# EAGLE board SparkFun_ESLOV_to_Qwiic_Bridge-Panel (EAGLE 9.6.2), part 1 of 3
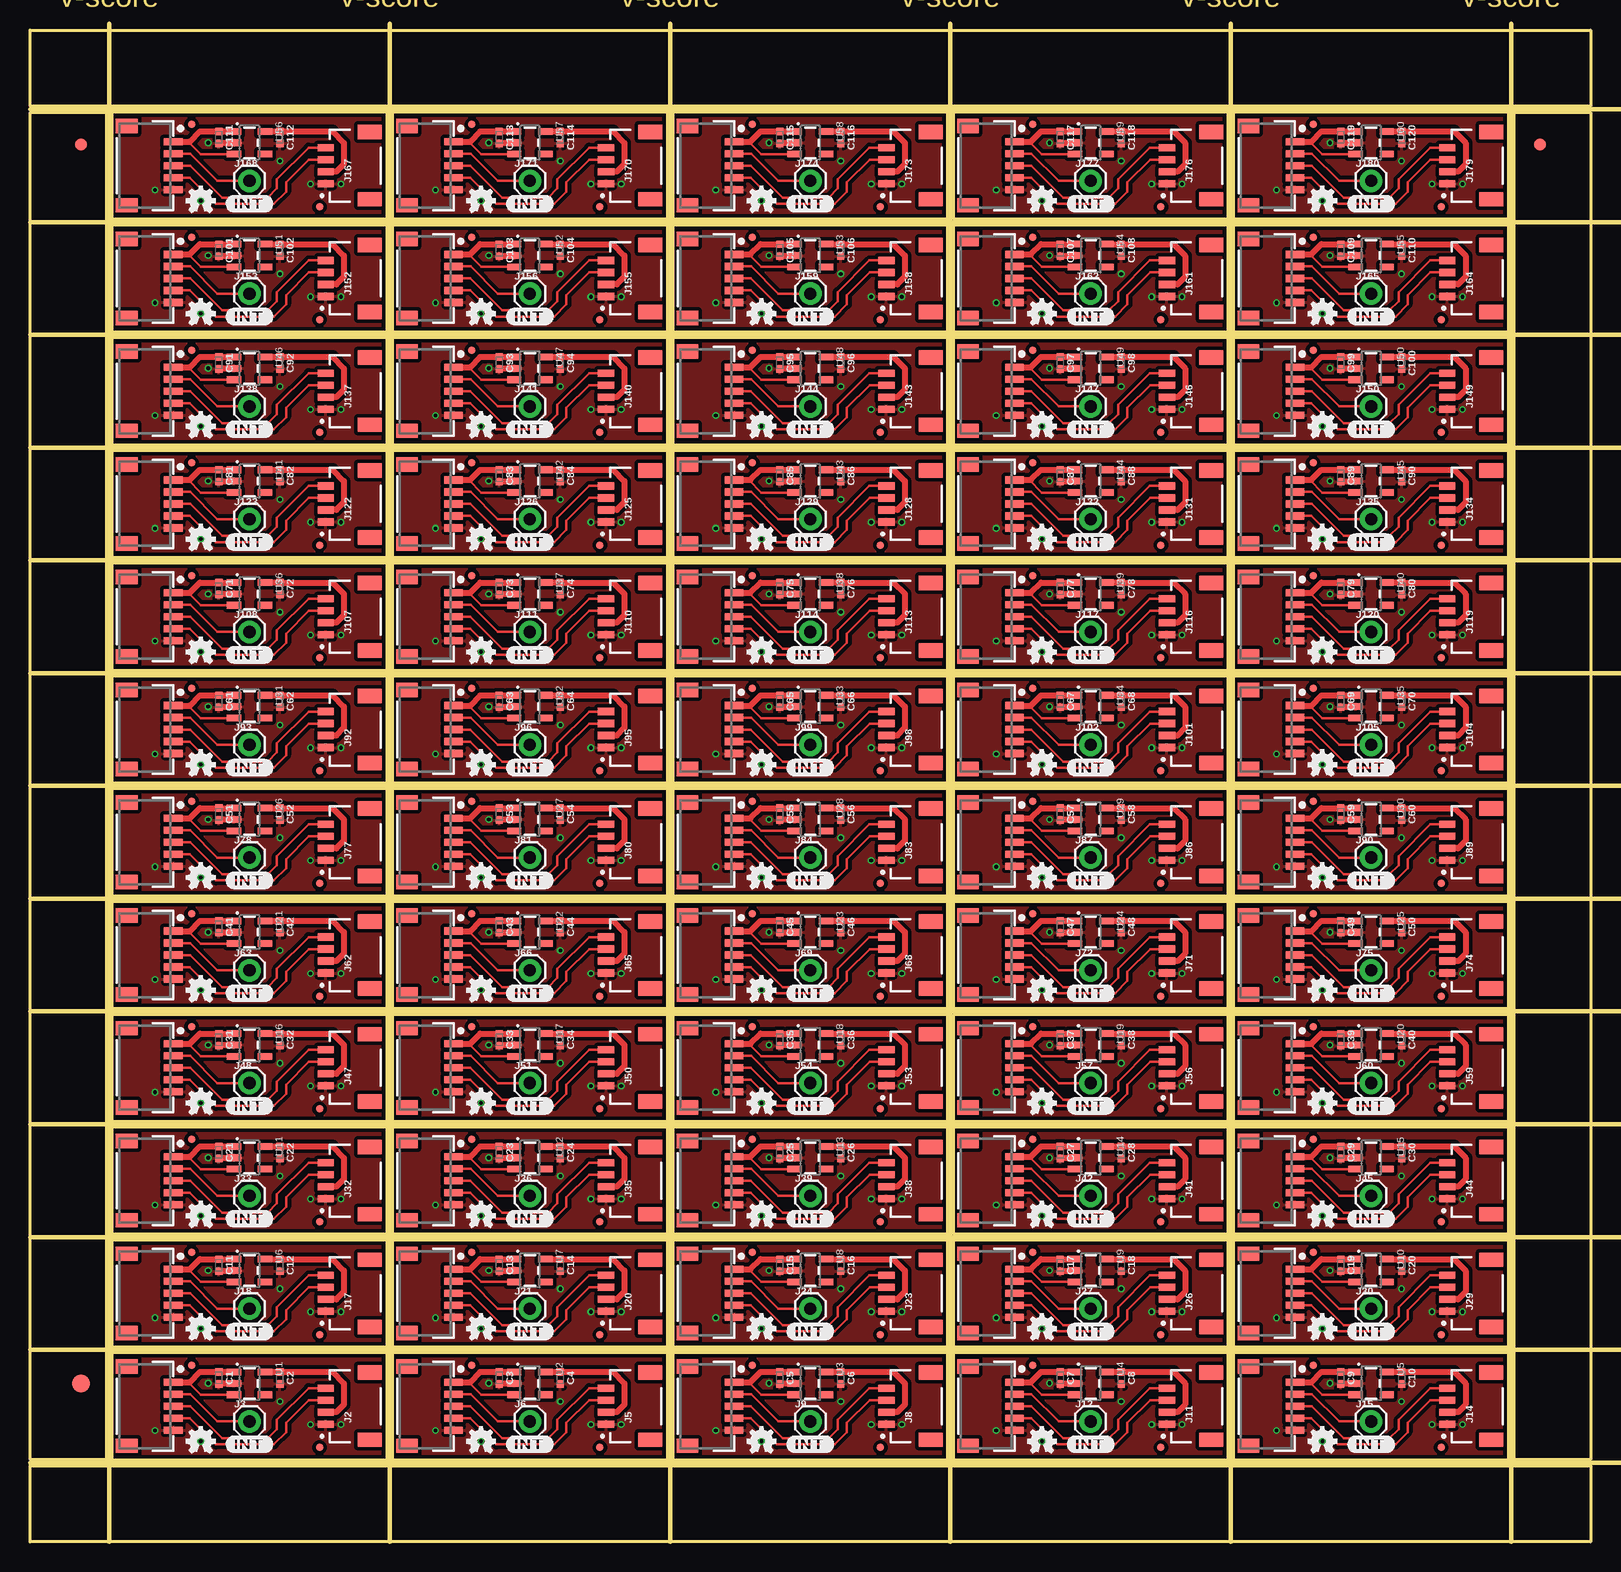
[diagram p0: board, top side]
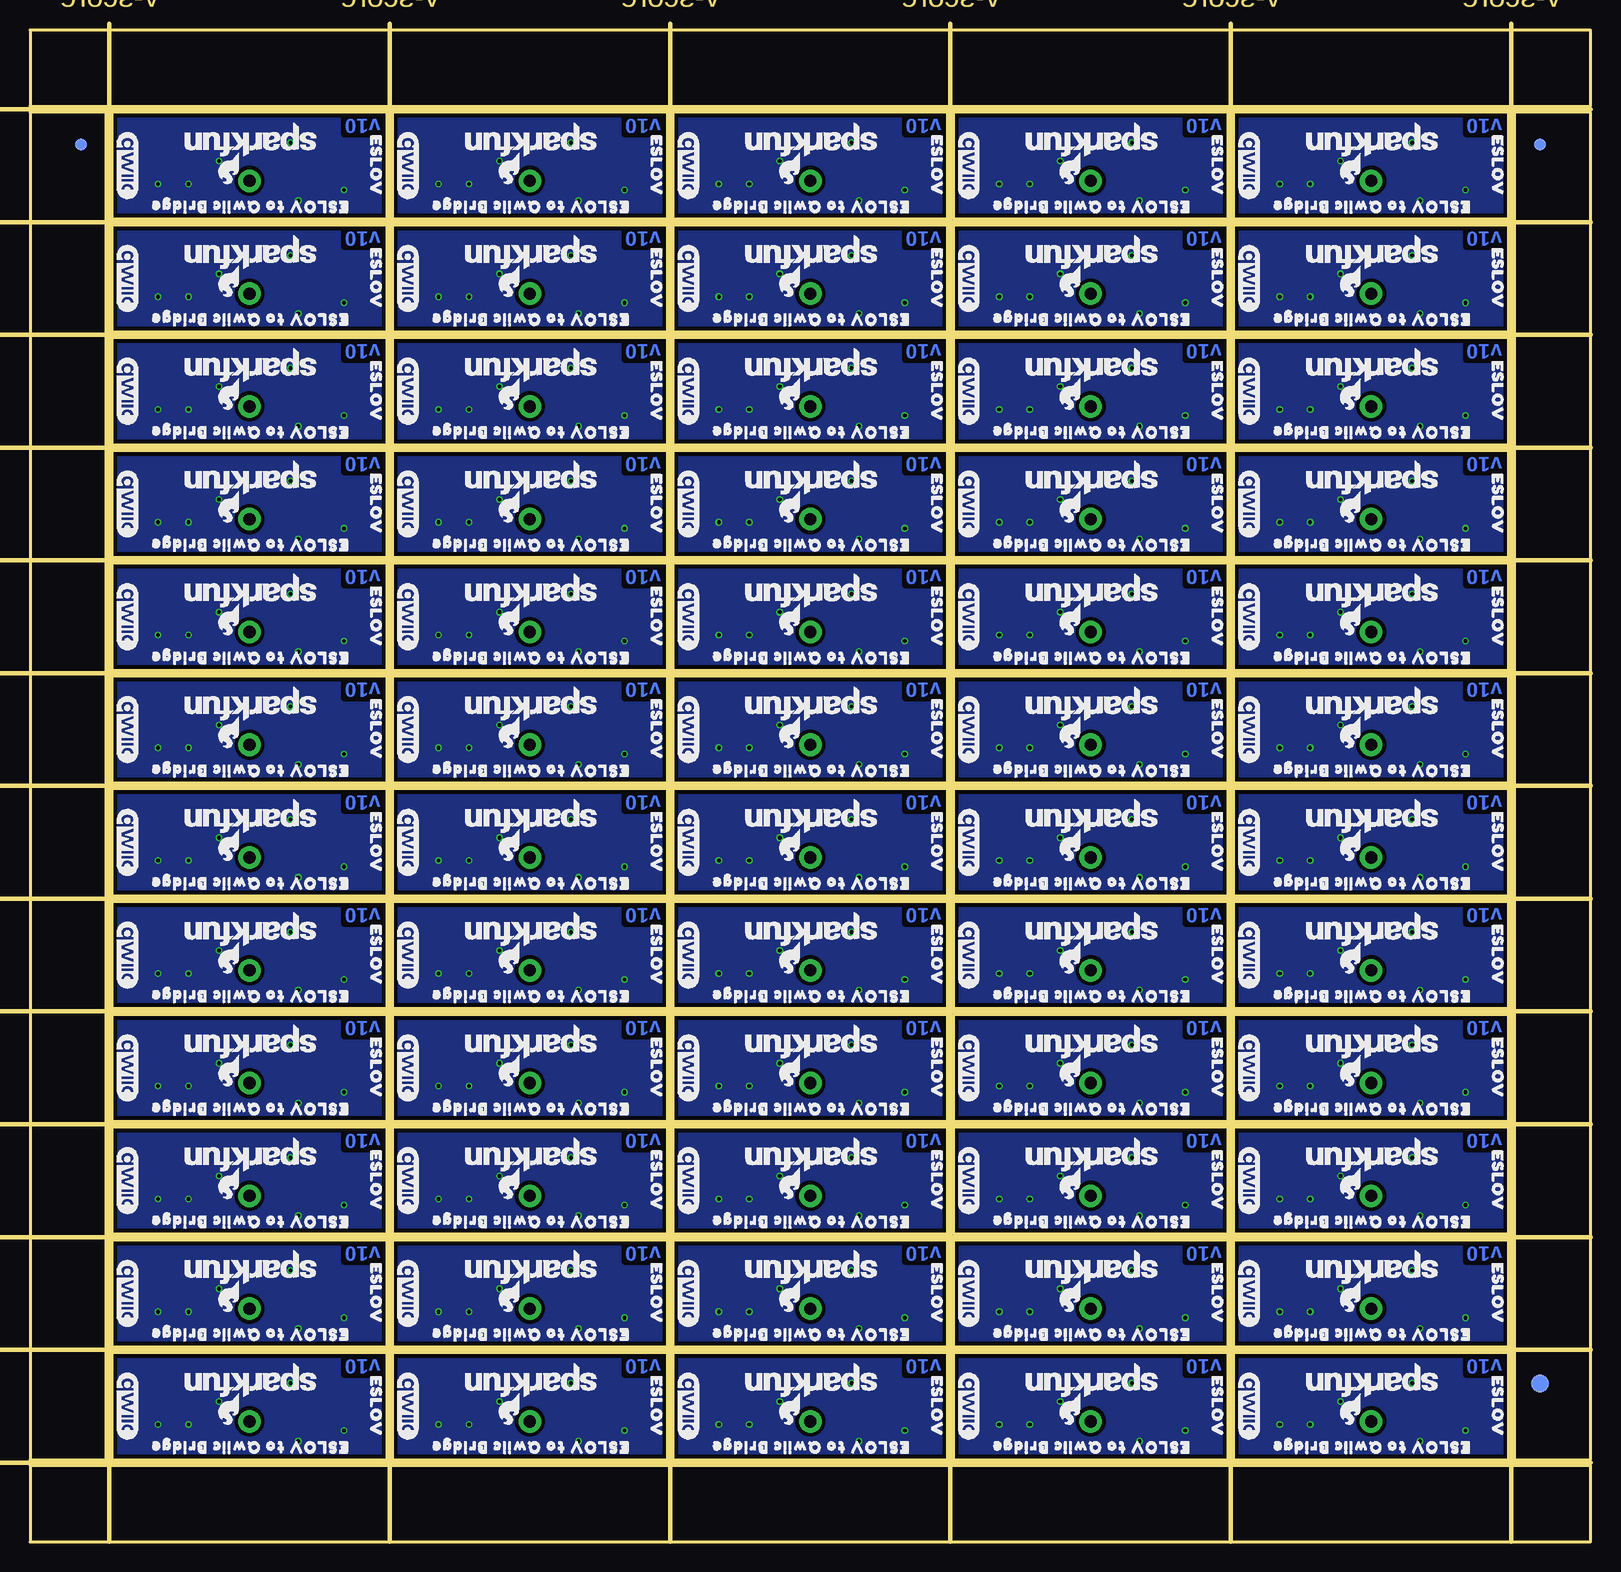
[diagram p1: board, bottom side, seen from below]

Size 130.05 x 125.98 mm. Coordinates in mm from the lower left corner, seen from the top.
Outline: 256 segments
Copper layers (1*16): Top 0.035mm / dielectric 1.5mm / Bottom 0.035mm
Design rules "SparkFun_ESLOV_to_Qwiic_Bridge": minimum track width 5mil, minimum drill 0.3mm, track to track 5mil, track to pad 5mil, pad to pad 5mil, via to via 5mil, smd to smd 5mil, copper to edge 7mil, drill to drill 7mil, minimum pad ring 5mil, minimum via ring 5mil, stop-mask expansion 2.5mil, vias tented up to drill 25mil, thermal gap 10mil
Milling: 19 lines

## Footprints (pad centres in the part's own frame; a part is rotated, then mirrored left to right if it is on the bottom)
0402-TIGHT = smd 0.6 x 0.6: 1 -0.5,0; 2 0.5,0
FIDUCIAL-1X2 = smd 1 x 1: 1 0,0
FIDUCIAL-1.5X3 = smd 1.5 x 1.5: 1 0,0
FIDUCIAL-MICRO = smd 0.635 x 0.635: 1 0,0
JST_5_1MM_RA = smd 0.6 x 1.55: 1 -2,0; 2 -1,0; 3 0,0; 4 1,0; 5 2,0 | smd 1.2 x 1.8: NC1 3.3,-3.875; NC2 -3.3,-3.875
JST04_1MM_RA = smd 0.6 x 1.35: 1 -1.5,0; 2 -0.5,0; 3 0.5,0; 4 1.5,0 | smd 1.2 x 2: NC1 2.8,-3.675; NC2 -2.8,-3.675
1X01 = drill 1.016 pad 1.88: 1 0,0
SOT23-5 = smd 0.55 x 1.2: 1 -0.95,-1.3; 2 0,-1.3; 3 0.95,-1.3; 4 0.95,1.3; 5 -0.95,1.3

## Placement (x,y rotation side)
C1  1.0uF  [0402-TIGHT]  15.75,13.65 270 top
C2  1.0uF  [0402-TIGHT]  20.83,13.65 270 top
C3  1.0uF  [0402-TIGHT]  39.12,13.65 270 top
C4  1.0uF  [0402-TIGHT]  44.2,13.65 270 top
C5  1.0uF  [0402-TIGHT]  62.48,13.65 270 top
C6  1.0uF  [0402-TIGHT]  67.56,13.65 270 top
C7  1.0uF  [0402-TIGHT]  85.85,13.65 270 top
C8  1.0uF  [0402-TIGHT]  90.93,13.65 270 top
C9  1.0uF  [0402-TIGHT]  109.22,13.65 270 top
C10  1.0uF  [0402-TIGHT]  114.3,13.65 270 top
C11  1.0uF  [0402-TIGHT]  15.75,23.05 270 top
C12  1.0uF  [0402-TIGHT]  20.83,23.05 270 top
C13  1.0uF  [0402-TIGHT]  39.12,23.05 270 top
C14  1.0uF  [0402-TIGHT]  44.2,23.05 270 top
C15  1.0uF  [0402-TIGHT]  62.48,23.05 270 top
C16  1.0uF  [0402-TIGHT]  67.56,23.05 270 top
C17  1.0uF  [0402-TIGHT]  85.85,23.05 270 top
C18  1.0uF  [0402-TIGHT]  90.93,23.05 270 top
C19  1.0uF  [0402-TIGHT]  109.22,23.05 270 top
C20  1.0uF  [0402-TIGHT]  114.3,23.05 270 top
C21  1.0uF  [0402-TIGHT]  15.75,32.45 270 top
C22  1.0uF  [0402-TIGHT]  20.83,32.45 270 top
C23  1.0uF  [0402-TIGHT]  39.12,32.45 270 top
C24  1.0uF  [0402-TIGHT]  44.2,32.45 270 top
C25  1.0uF  [0402-TIGHT]  62.48,32.45 270 top
C26  1.0uF  [0402-TIGHT]  67.56,32.45 270 top
C27  1.0uF  [0402-TIGHT]  85.85,32.45 270 top
C28  1.0uF  [0402-TIGHT]  90.93,32.45 270 top
C29  1.0uF  [0402-TIGHT]  109.22,32.45 270 top
C30  1.0uF  [0402-TIGHT]  114.3,32.45 270 top
C31  1.0uF  [0402-TIGHT]  15.75,41.85 270 top
C32  1.0uF  [0402-TIGHT]  20.83,41.85 270 top
C33  1.0uF  [0402-TIGHT]  39.12,41.85 270 top
C34  1.0uF  [0402-TIGHT]  44.2,41.85 270 top
C35  1.0uF  [0402-TIGHT]  62.48,41.85 270 top
C36  1.0uF  [0402-TIGHT]  67.56,41.85 270 top
C37  1.0uF  [0402-TIGHT]  85.85,41.85 270 top
C38  1.0uF  [0402-TIGHT]  90.93,41.85 270 top
C39  1.0uF  [0402-TIGHT]  109.22,41.85 270 top
C40  1.0uF  [0402-TIGHT]  114.3,41.85 270 top
C41  1.0uF  [0402-TIGHT]  15.75,51.24 270 top
C42  1.0uF  [0402-TIGHT]  20.83,51.24 270 top
C43  1.0uF  [0402-TIGHT]  39.12,51.24 270 top
C44  1.0uF  [0402-TIGHT]  44.2,51.24 270 top
C45  1.0uF  [0402-TIGHT]  62.48,51.24 270 top
C46  1.0uF  [0402-TIGHT]  67.56,51.24 270 top
C47  1.0uF  [0402-TIGHT]  85.85,51.24 270 top
C48  1.0uF  [0402-TIGHT]  90.93,51.24 270 top
C49  1.0uF  [0402-TIGHT]  109.22,51.24 270 top
C50  1.0uF  [0402-TIGHT]  114.3,51.24 270 top
C51  1.0uF  [0402-TIGHT]  15.75,60.64 270 top
C52  1.0uF  [0402-TIGHT]  20.83,60.64 270 top
C53  1.0uF  [0402-TIGHT]  39.12,60.64 270 top
C54  1.0uF  [0402-TIGHT]  44.2,60.64 270 top
C55  1.0uF  [0402-TIGHT]  62.48,60.64 270 top
C56  1.0uF  [0402-TIGHT]  67.56,60.64 270 top
C57  1.0uF  [0402-TIGHT]  85.85,60.64 270 top
C58  1.0uF  [0402-TIGHT]  90.93,60.64 270 top
C59  1.0uF  [0402-TIGHT]  109.22,60.64 270 top
C60  1.0uF  [0402-TIGHT]  114.3,60.64 270 top
C61  1.0uF  [0402-TIGHT]  15.75,70.04 270 top
C62  1.0uF  [0402-TIGHT]  20.83,70.04 270 top
C63  1.0uF  [0402-TIGHT]  39.12,70.04 270 top
C64  1.0uF  [0402-TIGHT]  44.2,70.04 270 top
C65  1.0uF  [0402-TIGHT]  62.48,70.04 270 top
C66  1.0uF  [0402-TIGHT]  67.56,70.04 270 top
C67  1.0uF  [0402-TIGHT]  85.85,70.04 270 top
C68  1.0uF  [0402-TIGHT]  90.93,70.04 270 top
C69  1.0uF  [0402-TIGHT]  109.22,70.04 270 top
C70  1.0uF  [0402-TIGHT]  114.3,70.04 270 top
C71  1.0uF  [0402-TIGHT]  15.75,79.44 270 top
C72  1.0uF  [0402-TIGHT]  20.83,79.44 270 top
C73  1.0uF  [0402-TIGHT]  39.12,79.44 270 top
C74  1.0uF  [0402-TIGHT]  44.2,79.44 270 top
C75  1.0uF  [0402-TIGHT]  62.48,79.44 270 top
C76  1.0uF  [0402-TIGHT]  67.56,79.44 270 top
C77  1.0uF  [0402-TIGHT]  85.85,79.44 270 top
C78  1.0uF  [0402-TIGHT]  90.93,79.44 270 top
C79  1.0uF  [0402-TIGHT]  109.22,79.44 270 top
C80  1.0uF  [0402-TIGHT]  114.3,79.44 270 top
C81  1.0uF  [0402-TIGHT]  15.75,88.84 270 top
C82  1.0uF  [0402-TIGHT]  20.83,88.84 270 top
C83  1.0uF  [0402-TIGHT]  39.12,88.84 270 top
C84  1.0uF  [0402-TIGHT]  44.2,88.84 270 top
C85  1.0uF  [0402-TIGHT]  62.48,88.84 270 top
C86  1.0uF  [0402-TIGHT]  67.56,88.84 270 top
C87  1.0uF  [0402-TIGHT]  85.85,88.84 270 top
C88  1.0uF  [0402-TIGHT]  90.93,88.84 270 top
C89  1.0uF  [0402-TIGHT]  109.22,88.84 270 top
C90  1.0uF  [0402-TIGHT]  114.3,88.84 270 top
C91  1.0uF  [0402-TIGHT]  15.75,98.23 270 top
C92  1.0uF  [0402-TIGHT]  20.83,98.23 270 top
C93  1.0uF  [0402-TIGHT]  39.12,98.23 270 top
C94  1.0uF  [0402-TIGHT]  44.2,98.23 270 top
C95  1.0uF  [0402-TIGHT]  62.48,98.23 270 top
C96  1.0uF  [0402-TIGHT]  67.56,98.23 270 top
C97  1.0uF  [0402-TIGHT]  85.85,98.23 270 top
C98  1.0uF  [0402-TIGHT]  90.93,98.23 270 top
C99  1.0uF  [0402-TIGHT]  109.22,98.23 270 top
C100  1.0uF  [0402-TIGHT]  114.3,98.23 270 top
C101  1.0uF  [0402-TIGHT]  15.75,107.63 270 top
C102  1.0uF  [0402-TIGHT]  20.83,107.63 270 top
C103  1.0uF  [0402-TIGHT]  39.12,107.63 270 top
C104  1.0uF  [0402-TIGHT]  44.2,107.63 270 top
C105  1.0uF  [0402-TIGHT]  62.48,107.63 270 top
C106  1.0uF  [0402-TIGHT]  67.56,107.63 270 top
C107  1.0uF  [0402-TIGHT]  85.85,107.63 270 top
C108  1.0uF  [0402-TIGHT]  90.93,107.63 270 top
C109  1.0uF  [0402-TIGHT]  109.22,107.63 270 top
C110  1.0uF  [0402-TIGHT]  114.3,107.63 270 top
C111  1.0uF  [0402-TIGHT]  15.75,117.03 270 top
C112  1.0uF  [0402-TIGHT]  20.83,117.03 270 top
C113  1.0uF  [0402-TIGHT]  39.12,117.03 270 top
C114  1.0uF  [0402-TIGHT]  44.2,117.03 270 top
C115  1.0uF  [0402-TIGHT]  62.48,117.03 270 top
C116  1.0uF  [0402-TIGHT]  67.56,117.03 270 top
C117  1.0uF  [0402-TIGHT]  85.85,117.03 270 top
C118  1.0uF  [0402-TIGHT]  90.93,117.03 270 top
C119  1.0uF  [0402-TIGHT]  109.22,117.03 270 top
C120  1.0uF  [0402-TIGHT]  114.3,117.03 270 top
E$1  [FIDUCIAL-1X2]  4.23,116.46 0 top
E$2  [FIDUCIAL-1X2]  4.23,116.46 0 bottom
E$3  [FIDUCIAL-1X2]  125.81,116.46 0 top
E$4  [FIDUCIAL-1X2]  125.81,116.46 0 bottom
E$5  [FIDUCIAL-1.5X3]  4.23,13.21 0 top
E$6  [FIDUCIAL-1.5X3]  4.23,13.21 0 bottom
FD1  FIDUCIALUFIDUCIAL  [FIDUCIAL-MICRO]  24.13,7.87 0 top
FD2  FIDUCIALUFIDUCIAL  [FIDUCIAL-MICRO]  13.46,14.73 0 top
FD3  FIDUCIALUFIDUCIAL  [FIDUCIAL-MICRO]  47.5,7.87 0 top
FD4  FIDUCIALUFIDUCIAL  [FIDUCIAL-MICRO]  36.83,14.73 0 top
FD5  FIDUCIALUFIDUCIAL  [FIDUCIAL-MICRO]  70.87,7.87 0 top
FD6  FIDUCIALUFIDUCIAL  [FIDUCIAL-MICRO]  60.2,14.73 0 top
FD7  FIDUCIALUFIDUCIAL  [FIDUCIAL-MICRO]  94.23,7.87 0 top
FD8  FIDUCIALUFIDUCIAL  [FIDUCIAL-MICRO]  83.57,14.73 0 top
FD9  FIDUCIALUFIDUCIAL  [FIDUCIAL-MICRO]  117.6,7.87 0 top
FD10  FIDUCIALUFIDUCIAL  [FIDUCIAL-MICRO]  106.93,14.73 0 top
FD11  FIDUCIALUFIDUCIAL  [FIDUCIAL-MICRO]  24.13,17.27 0 top
FD12  FIDUCIALUFIDUCIAL  [FIDUCIAL-MICRO]  13.46,24.13 0 top
FD13  FIDUCIALUFIDUCIAL  [FIDUCIAL-MICRO]  47.5,17.27 0 top
FD14  FIDUCIALUFIDUCIAL  [FIDUCIAL-MICRO]  36.83,24.13 0 top
FD15  FIDUCIALUFIDUCIAL  [FIDUCIAL-MICRO]  70.87,17.27 0 top
FD16  FIDUCIALUFIDUCIAL  [FIDUCIAL-MICRO]  60.2,24.13 0 top
FD17  FIDUCIALUFIDUCIAL  [FIDUCIAL-MICRO]  94.23,17.27 0 top
FD18  FIDUCIALUFIDUCIAL  [FIDUCIAL-MICRO]  83.57,24.13 0 top
FD19  FIDUCIALUFIDUCIAL  [FIDUCIAL-MICRO]  117.6,17.27 0 top
FD20  FIDUCIALUFIDUCIAL  [FIDUCIAL-MICRO]  106.93,24.13 0 top
FD21  FIDUCIALUFIDUCIAL  [FIDUCIAL-MICRO]  24.13,26.67 0 top
FD22  FIDUCIALUFIDUCIAL  [FIDUCIAL-MICRO]  13.46,33.53 0 top
FD23  FIDUCIALUFIDUCIAL  [FIDUCIAL-MICRO]  47.5,26.67 0 top
FD24  FIDUCIALUFIDUCIAL  [FIDUCIAL-MICRO]  36.83,33.53 0 top
FD25  FIDUCIALUFIDUCIAL  [FIDUCIAL-MICRO]  70.87,26.67 0 top
FD26  FIDUCIALUFIDUCIAL  [FIDUCIAL-MICRO]  60.2,33.53 0 top
FD27  FIDUCIALUFIDUCIAL  [FIDUCIAL-MICRO]  94.23,26.67 0 top
FD28  FIDUCIALUFIDUCIAL  [FIDUCIAL-MICRO]  83.57,33.53 0 top
FD29  FIDUCIALUFIDUCIAL  [FIDUCIAL-MICRO]  117.6,26.67 0 top
FD30  FIDUCIALUFIDUCIAL  [FIDUCIAL-MICRO]  106.93,33.53 0 top
FD31  FIDUCIALUFIDUCIAL  [FIDUCIAL-MICRO]  24.13,36.07 0 top
FD32  FIDUCIALUFIDUCIAL  [FIDUCIAL-MICRO]  13.46,42.93 0 top
FD33  FIDUCIALUFIDUCIAL  [FIDUCIAL-MICRO]  47.5,36.07 0 top
FD34  FIDUCIALUFIDUCIAL  [FIDUCIAL-MICRO]  36.83,42.93 0 top
FD35  FIDUCIALUFIDUCIAL  [FIDUCIAL-MICRO]  70.87,36.07 0 top
FD36  FIDUCIALUFIDUCIAL  [FIDUCIAL-MICRO]  60.2,42.93 0 top
FD37  FIDUCIALUFIDUCIAL  [FIDUCIAL-MICRO]  94.23,36.07 0 top
FD38  FIDUCIALUFIDUCIAL  [FIDUCIAL-MICRO]  83.57,42.93 0 top
FD39  FIDUCIALUFIDUCIAL  [FIDUCIAL-MICRO]  117.6,36.07 0 top
FD40  FIDUCIALUFIDUCIAL  [FIDUCIAL-MICRO]  106.93,42.93 0 top
FD41  FIDUCIALUFIDUCIAL  [FIDUCIAL-MICRO]  24.13,45.47 0 top
FD42  FIDUCIALUFIDUCIAL  [FIDUCIAL-MICRO]  13.46,52.32 0 top
FD43  FIDUCIALUFIDUCIAL  [FIDUCIAL-MICRO]  47.5,45.47 0 top
FD44  FIDUCIALUFIDUCIAL  [FIDUCIAL-MICRO]  36.83,52.32 0 top
FD45  FIDUCIALUFIDUCIAL  [FIDUCIAL-MICRO]  70.87,45.47 0 top
FD46  FIDUCIALUFIDUCIAL  [FIDUCIAL-MICRO]  60.2,52.32 0 top
FD47  FIDUCIALUFIDUCIAL  [FIDUCIAL-MICRO]  94.23,45.47 0 top
FD48  FIDUCIALUFIDUCIAL  [FIDUCIAL-MICRO]  83.57,52.32 0 top
FD49  FIDUCIALUFIDUCIAL  [FIDUCIAL-MICRO]  117.6,45.47 0 top
FD50  FIDUCIALUFIDUCIAL  [FIDUCIAL-MICRO]  106.93,52.32 0 top
FD51  FIDUCIALUFIDUCIAL  [FIDUCIAL-MICRO]  24.13,54.86 0 top
FD52  FIDUCIALUFIDUCIAL  [FIDUCIAL-MICRO]  13.46,61.72 0 top
FD53  FIDUCIALUFIDUCIAL  [FIDUCIAL-MICRO]  47.5,54.86 0 top
FD54  FIDUCIALUFIDUCIAL  [FIDUCIAL-MICRO]  36.83,61.72 0 top
FD55  FIDUCIALUFIDUCIAL  [FIDUCIAL-MICRO]  70.87,54.86 0 top
FD56  FIDUCIALUFIDUCIAL  [FIDUCIAL-MICRO]  60.2,61.72 0 top
FD57  FIDUCIALUFIDUCIAL  [FIDUCIAL-MICRO]  94.23,54.86 0 top
FD58  FIDUCIALUFIDUCIAL  [FIDUCIAL-MICRO]  83.57,61.72 0 top
FD59  FIDUCIALUFIDUCIAL  [FIDUCIAL-MICRO]  117.6,54.86 0 top
FD60  FIDUCIALUFIDUCIAL  [FIDUCIAL-MICRO]  106.93,61.72 0 top
FD61  FIDUCIALUFIDUCIAL  [FIDUCIAL-MICRO]  24.13,64.26 0 top
FD62  FIDUCIALUFIDUCIAL  [FIDUCIAL-MICRO]  13.46,71.12 0 top
FD63  FIDUCIALUFIDUCIAL  [FIDUCIAL-MICRO]  47.5,64.26 0 top
FD64  FIDUCIALUFIDUCIAL  [FIDUCIAL-MICRO]  36.83,71.12 0 top
FD65  FIDUCIALUFIDUCIAL  [FIDUCIAL-MICRO]  70.87,64.26 0 top
FD66  FIDUCIALUFIDUCIAL  [FIDUCIAL-MICRO]  60.2,71.12 0 top
FD67  FIDUCIALUFIDUCIAL  [FIDUCIAL-MICRO]  94.23,64.26 0 top
FD68  FIDUCIALUFIDUCIAL  [FIDUCIAL-MICRO]  83.57,71.12 0 top
FD69  FIDUCIALUFIDUCIAL  [FIDUCIAL-MICRO]  117.6,64.26 0 top
FD70  FIDUCIALUFIDUCIAL  [FIDUCIAL-MICRO]  106.93,71.12 0 top
FD71  FIDUCIALUFIDUCIAL  [FIDUCIAL-MICRO]  24.13,73.66 0 top
FD72  FIDUCIALUFIDUCIAL  [FIDUCIAL-MICRO]  13.46,80.52 0 top
FD73  FIDUCIALUFIDUCIAL  [FIDUCIAL-MICRO]  47.5,73.66 0 top
FD74  FIDUCIALUFIDUCIAL  [FIDUCIAL-MICRO]  36.83,80.52 0 top
FD75  FIDUCIALUFIDUCIAL  [FIDUCIAL-MICRO]  70.87,73.66 0 top
FD76  FIDUCIALUFIDUCIAL  [FIDUCIAL-MICRO]  60.2,80.52 0 top
FD77  FIDUCIALUFIDUCIAL  [FIDUCIAL-MICRO]  94.23,73.66 0 top
FD78  FIDUCIALUFIDUCIAL  [FIDUCIAL-MICRO]  83.57,80.52 0 top
FD79  FIDUCIALUFIDUCIAL  [FIDUCIAL-MICRO]  117.6,73.66 0 top
FD80  FIDUCIALUFIDUCIAL  [FIDUCIAL-MICRO]  106.93,80.52 0 top
FD81  FIDUCIALUFIDUCIAL  [FIDUCIAL-MICRO]  24.13,83.06 0 top
FD82  FIDUCIALUFIDUCIAL  [FIDUCIAL-MICRO]  13.46,89.92 0 top
FD83  FIDUCIALUFIDUCIAL  [FIDUCIAL-MICRO]  47.5,83.06 0 top
FD84  FIDUCIALUFIDUCIAL  [FIDUCIAL-MICRO]  36.83,89.92 0 top
FD85  FIDUCIALUFIDUCIAL  [FIDUCIAL-MICRO]  70.87,83.06 0 top
FD86  FIDUCIALUFIDUCIAL  [FIDUCIAL-MICRO]  60.2,89.92 0 top
FD87  FIDUCIALUFIDUCIAL  [FIDUCIAL-MICRO]  94.23,83.06 0 top
FD88  FIDUCIALUFIDUCIAL  [FIDUCIAL-MICRO]  83.57,89.92 0 top
FD89  FIDUCIALUFIDUCIAL  [FIDUCIAL-MICRO]  117.6,83.06 0 top
FD90  FIDUCIALUFIDUCIAL  [FIDUCIAL-MICRO]  106.93,89.92 0 top
FD91  FIDUCIALUFIDUCIAL  [FIDUCIAL-MICRO]  24.13,92.46 0 top
FD92  FIDUCIALUFIDUCIAL  [FIDUCIAL-MICRO]  13.46,99.31 0 top
FD93  FIDUCIALUFIDUCIAL  [FIDUCIAL-MICRO]  47.5,92.46 0 top
FD94  FIDUCIALUFIDUCIAL  [FIDUCIAL-MICRO]  36.83,99.31 0 top
FD95  FIDUCIALUFIDUCIAL  [FIDUCIAL-MICRO]  70.87,92.46 0 top
FD96  FIDUCIALUFIDUCIAL  [FIDUCIAL-MICRO]  60.2,99.31 0 top
FD97  FIDUCIALUFIDUCIAL  [FIDUCIAL-MICRO]  94.23,92.46 0 top
FD98  FIDUCIALUFIDUCIAL  [FIDUCIAL-MICRO]  83.57,99.31 0 top
FD99  FIDUCIALUFIDUCIAL  [FIDUCIAL-MICRO]  117.6,92.46 0 top
FD100  FIDUCIALUFIDUCIAL  [FIDUCIAL-MICRO]  106.93,99.31 0 top
FD101  FIDUCIALUFIDUCIAL  [FIDUCIAL-MICRO]  24.13,101.85 0 top
FD102  FIDUCIALUFIDUCIAL  [FIDUCIAL-MICRO]  13.46,108.71 0 top
FD103  FIDUCIALUFIDUCIAL  [FIDUCIAL-MICRO]  47.5,101.85 0 top
FD104  FIDUCIALUFIDUCIAL  [FIDUCIAL-MICRO]  36.83,108.71 0 top
FD105  FIDUCIALUFIDUCIAL  [FIDUCIAL-MICRO]  70.87,101.85 0 top
FD106  FIDUCIALUFIDUCIAL  [FIDUCIAL-MICRO]  60.2,108.71 0 top
FD107  FIDUCIALUFIDUCIAL  [FIDUCIAL-MICRO]  94.23,101.85 0 top
FD108  FIDUCIALUFIDUCIAL  [FIDUCIAL-MICRO]  83.57,108.71 0 top
FD109  FIDUCIALUFIDUCIAL  [FIDUCIAL-MICRO]  117.6,101.85 0 top
FD110  FIDUCIALUFIDUCIAL  [FIDUCIAL-MICRO]  106.93,108.71 0 top
FD111  FIDUCIALUFIDUCIAL  [FIDUCIAL-MICRO]  24.13,111.25 0 top
FD112  FIDUCIALUFIDUCIAL  [FIDUCIAL-MICRO]  13.46,118.11 0 top
FD113  FIDUCIALUFIDUCIAL  [FIDUCIAL-MICRO]  47.5,111.25 0 top
FD114  FIDUCIALUFIDUCIAL  [FIDUCIAL-MICRO]  36.83,118.11 0 top
FD115  FIDUCIALUFIDUCIAL  [FIDUCIAL-MICRO]  70.87,111.25 0 top
FD116  FIDUCIALUFIDUCIAL  [FIDUCIAL-MICRO]  60.2,118.11 0 top
FD117  FIDUCIALUFIDUCIAL  [FIDUCIAL-MICRO]  94.23,111.25 0 top
FD118  FIDUCIALUFIDUCIAL  [FIDUCIAL-MICRO]  83.57,118.11 0 top
FD119  FIDUCIALUFIDUCIAL  [FIDUCIAL-MICRO]  117.6,111.25 0 top
FD120  FIDUCIALUFIDUCIAL  [FIDUCIAL-MICRO]  106.93,118.11 0 top
J1  ESLOV RA  [JST_5_1MM_RA]  11.94,11.3 270 top
J2  QWIIC_RA  [JST04_1MM_RA]  24.64,11.3 90 top
J3  [1X01]  18.29,10.03 0 top
J4  ESLOV RA  [JST_5_1MM_RA]  35.31,11.3 270 top
J5  QWIIC_RA  [JST04_1MM_RA]  48.01,11.3 90 top
J6  [1X01]  41.66,10.03 0 top
J7  ESLOV RA  [JST_5_1MM_RA]  58.67,11.3 270 top
J8  QWIIC_RA  [JST04_1MM_RA]  71.37,11.3 90 top
J9  [1X01]  65.02,10.03 0 top
J10  ESLOV RA  [JST_5_1MM_RA]  82.04,11.3 270 top
J11  QWIIC_RA  [JST04_1MM_RA]  94.74,11.3 90 top
J12  [1X01]  88.39,10.03 0 top
J13  ESLOV RA  [JST_5_1MM_RA]  105.41,11.3 270 top
J14  QWIIC_RA  [JST04_1MM_RA]  118.11,11.3 90 top
J15  [1X01]  111.76,10.03 0 top
J16  ESLOV RA  [JST_5_1MM_RA]  11.94,20.7 270 top
J17  QWIIC_RA  [JST04_1MM_RA]  24.64,20.7 90 top
J18  [1X01]  18.29,19.43 0 top
J19  ESLOV RA  [JST_5_1MM_RA]  35.31,20.7 270 top
J20  QWIIC_RA  [JST04_1MM_RA]  48.01,20.7 90 top
J21  [1X01]  41.66,19.43 0 top
J22  ESLOV RA  [JST_5_1MM_RA]  58.67,20.7 270 top
J23  QWIIC_RA  [JST04_1MM_RA]  71.37,20.7 90 top
J24  [1X01]  65.02,19.43 0 top
J25  ESLOV RA  [JST_5_1MM_RA]  82.04,20.7 270 top
J26  QWIIC_RA  [JST04_1MM_RA]  94.74,20.7 90 top
J27  [1X01]  88.39,19.43 0 top
J28  ESLOV RA  [JST_5_1MM_RA]  105.41,20.7 270 top
J29  QWIIC_RA  [JST04_1MM_RA]  118.11,20.7 90 top
J30  [1X01]  111.76,19.43 0 top
J31  ESLOV RA  [JST_5_1MM_RA]  11.94,30.1 270 top
J32  QWIIC_RA  [JST04_1MM_RA]  24.64,30.1 90 top
J33  [1X01]  18.29,28.83 0 top
J34  ESLOV RA  [JST_5_1MM_RA]  35.31,30.1 270 top
J35  QWIIC_RA  [JST04_1MM_RA]  48.01,30.1 90 top
J36  [1X01]  41.66,28.83 0 top
J37  ESLOV RA  [JST_5_1MM_RA]  58.67,30.1 270 top
J38  QWIIC_RA  [JST04_1MM_RA]  71.37,30.1 90 top
J39  [1X01]  65.02,28.83 0 top
J40  ESLOV RA  [JST_5_1MM_RA]  82.04,30.1 270 top
J41  QWIIC_RA  [JST04_1MM_RA]  94.74,30.1 90 top
J42  [1X01]  88.39,28.83 0 top
J43  ESLOV RA  [JST_5_1MM_RA]  105.41,30.1 270 top
J44  QWIIC_RA  [JST04_1MM_RA]  118.11,30.1 90 top
J45  [1X01]  111.76,28.83 0 top
J46  ESLOV RA  [JST_5_1MM_RA]  11.94,39.5 270 top
J47  QWIIC_RA  [JST04_1MM_RA]  24.64,39.5 90 top
J48  [1X01]  18.29,38.23 0 top
J49  ESLOV RA  [JST_5_1MM_RA]  35.31,39.5 270 top
J50  QWIIC_RA  [JST04_1MM_RA]  48.01,39.5 90 top
J51  [1X01]  41.66,38.23 0 top
J52  ESLOV RA  [JST_5_1MM_RA]  58.67,39.5 270 top
J53  QWIIC_RA  [JST04_1MM_RA]  71.37,39.5 90 top
J54  [1X01]  65.02,38.23 0 top
J55  ESLOV RA  [JST_5_1MM_RA]  82.04,39.5 270 top
J56  QWIIC_RA  [JST04_1MM_RA]  94.74,39.5 90 top
J57  [1X01]  88.39,38.23 0 top
J58  ESLOV RA  [JST_5_1MM_RA]  105.41,39.5 270 top
J59  QWIIC_RA  [JST04_1MM_RA]  118.11,39.5 90 top
J60  [1X01]  111.76,38.23 0 top
J61  ESLOV RA  [JST_5_1MM_RA]  11.94,48.89 270 top
J62  QWIIC_RA  [JST04_1MM_RA]  24.64,48.89 90 top
J63  [1X01]  18.29,47.62 0 top
J64  ESLOV RA  [JST_5_1MM_RA]  35.31,48.89 270 top
J65  QWIIC_RA  [JST04_1MM_RA]  48.01,48.89 90 top
J66  [1X01]  41.66,47.62 0 top
J67  ESLOV RA  [JST_5_1MM_RA]  58.67,48.89 270 top
J68  QWIIC_RA  [JST04_1MM_RA]  71.37,48.89 90 top
J69  [1X01]  65.02,47.62 0 top
J70  ESLOV RA  [JST_5_1MM_RA]  82.04,48.89 270 top
J71  QWIIC_RA  [JST04_1MM_RA]  94.74,48.89 90 top
J72  [1X01]  88.39,47.62 0 top
J73  ESLOV RA  [JST_5_1MM_RA]  105.41,48.89 270 top
J74  QWIIC_RA  [JST04_1MM_RA]  118.11,48.89 90 top
J75  [1X01]  111.76,47.62 0 top
J76  ESLOV RA  [JST_5_1MM_RA]  11.94,58.29 270 top
J77  QWIIC_RA  [JST04_1MM_RA]  24.64,58.29 90 top
J78  [1X01]  18.29,57.02 0 top
J79  ESLOV RA  [JST_5_1MM_RA]  35.31,58.29 270 top
J80  QWIIC_RA  [JST04_1MM_RA]  48.01,58.29 90 top
J81  [1X01]  41.66,57.02 0 top
J82  ESLOV RA  [JST_5_1MM_RA]  58.67,58.29 270 top
J83  QWIIC_RA  [JST04_1MM_RA]  71.37,58.29 90 top
J84  [1X01]  65.02,57.02 0 top
J85  ESLOV RA  [JST_5_1MM_RA]  82.04,58.29 270 top
J86  QWIIC_RA  [JST04_1MM_RA]  94.74,58.29 90 top
J87  [1X01]  88.39,57.02 0 top
J88  ESLOV RA  [JST_5_1MM_RA]  105.41,58.29 270 top
J89  QWIIC_RA  [JST04_1MM_RA]  118.11,58.29 90 top
J90  [1X01]  111.76,57.02 0 top
J91  ESLOV RA  [JST_5_1MM_RA]  11.94,67.69 270 top
J92  QWIIC_RA  [JST04_1MM_RA]  24.64,67.69 90 top
J93  [1X01]  18.29,66.42 0 top
J94  ESLOV RA  [JST_5_1MM_RA]  35.31,67.69 270 top
J95  QWIIC_RA  [JST04_1MM_RA]  48.01,67.69 90 top
J96  [1X01]  41.66,66.42 0 top
J97  ESLOV RA  [JST_5_1MM_RA]  58.67,67.69 270 top
J98  QWIIC_RA  [JST04_1MM_RA]  71.37,67.69 90 top
J99  [1X01]  65.02,66.42 0 top
J100  ESLOV RA  [JST_5_1MM_RA]  82.04,67.69 270 top
J101  QWIIC_RA  [JST04_1MM_RA]  94.74,67.69 90 top
J102  [1X01]  88.39,66.42 0 top
J103  ESLOV RA  [JST_5_1MM_RA]  105.41,67.69 270 top
J104  QWIIC_RA  [JST04_1MM_RA]  118.11,67.69 90 top
J105  [1X01]  111.76,66.42 0 top
J106  ESLOV RA  [JST_5_1MM_RA]  11.94,77.09 270 top
J107  QWIIC_RA  [JST04_1MM_RA]  24.64,77.09 90 top
J108  [1X01]  18.29,75.82 0 top
J109  ESLOV RA  [JST_5_1MM_RA]  35.31,77.09 270 top
J110  QWIIC_RA  [JST04_1MM_RA]  48.01,77.09 90 top
J111  [1X01]  41.66,75.82 0 top
J112  ESLOV RA  [JST_5_1MM_RA]  58.67,77.09 270 top
J113  QWIIC_RA  [JST04_1MM_RA]  71.37,77.09 90 top
J114  [1X01]  65.02,75.82 0 top
J115  ESLOV RA  [JST_5_1MM_RA]  82.04,77.09 270 top
J116  QWIIC_RA  [JST04_1MM_RA]  94.74,77.09 90 top
J117  [1X01]  88.39,75.82 0 top
J118  ESLOV RA  [JST_5_1MM_RA]  105.41,77.09 270 top
J119  QWIIC_RA  [JST04_1MM_RA]  118.11,77.09 90 top
J120  [1X01]  111.76,75.82 0 top
J121  ESLOV RA  [JST_5_1MM_RA]  11.94,86.49 270 top
J122  QWIIC_RA  [JST04_1MM_RA]  24.64,86.49 90 top
J123  [1X01]  18.29,85.22 0 top
J124  ESLOV RA  [JST_5_1MM_RA]  35.31,86.49 270 top
J125  QWIIC_RA  [JST04_1MM_RA]  48.01,86.49 90 top
J126  [1X01]  41.66,85.22 0 top
J127  ESLOV RA  [JST_5_1MM_RA]  58.67,86.49 270 top
J128  QWIIC_RA  [JST04_1MM_RA]  71.37,86.49 90 top
J129  [1X01]  65.02,85.22 0 top
J130  ESLOV RA  [JST_5_1MM_RA]  82.04,86.49 270 top
J131  QWIIC_RA  [JST04_1MM_RA]  94.74,86.49 90 top
J132  [1X01]  88.39,85.22 0 top
J133  ESLOV RA  [JST_5_1MM_RA]  105.41,86.49 270 top
J134  QWIIC_RA  [JST04_1MM_RA]  118.11,86.49 90 top
J135  [1X01]  111.76,85.22 0 top
J136  ESLOV RA  [JST_5_1MM_RA]  11.94,95.89 270 top
J137  QWIIC_RA  [JST04_1MM_RA]  24.64,95.89 90 top
J138  [1X01]  18.29,94.62 0 top
J139  ESLOV RA  [JST_5_1MM_RA]  35.31,95.89 270 top
J140  QWIIC_RA  [JST04_1MM_RA]  48.01,95.89 90 top
J141  [1X01]  41.66,94.62 0 top
J142  ESLOV RA  [JST_5_1MM_RA]  58.67,95.89 270 top
J143  QWIIC_RA  [JST04_1MM_RA]  71.37,95.89 90 top
J144  [1X01]  65.02,94.62 0 top
J145  ESLOV RA  [JST_5_1MM_RA]  82.04,95.89 270 top
J146  QWIIC_RA  [JST04_1MM_RA]  94.74,95.89 90 top
J147  [1X01]  88.39,94.62 0 top
J148  ESLOV RA  [JST_5_1MM_RA]  105.41,95.89 270 top
J149  QWIIC_RA  [JST04_1MM_RA]  118.11,95.89 90 top
J150  [1X01]  111.76,94.62 0 top
J151  ESLOV RA  [JST_5_1MM_RA]  11.94,105.28 270 top
J152  QWIIC_RA  [JST04_1MM_RA]  24.64,105.28 90 top
J153  [1X01]  18.29,104.01 0 top
J154  ESLOV RA  [JST_5_1MM_RA]  35.31,105.28 270 top
J155  QWIIC_RA  [JST04_1MM_RA]  48.01,105.28 90 top
J156  [1X01]  41.66,104.01 0 top
J157  ESLOV RA  [JST_5_1MM_RA]  58.67,105.28 270 top
J158  QWIIC_RA  [JST04_1MM_RA]  71.37,105.28 90 top
J159  [1X01]  65.02,104.01 0 top
J160  ESLOV RA  [JST_5_1MM_RA]  82.04,105.28 270 top
J161  QWIIC_RA  [JST04_1MM_RA]  94.74,105.28 90 top
J162  [1X01]  88.39,104.01 0 top
J163  ESLOV RA  [JST_5_1MM_RA]  105.41,105.28 270 top
J164  QWIIC_RA  [JST04_1MM_RA]  118.11,105.28 90 top
J165  [1X01]  111.76,104.01 0 top
J166  ESLOV RA  [JST_5_1MM_RA]  11.94,114.68 270 top
J167  QWIIC_RA  [JST04_1MM_RA]  24.64,114.68 90 top
J168  [1X01]  18.29,113.41 0 top
J169  ESLOV RA  [JST_5_1MM_RA]  35.31,114.68 270 top
J170  QWIIC_RA  [JST04_1MM_RA]  48.01,114.68 90 top
J171  [1X01]  41.66,113.41 0 top
J172  ESLOV RA  [JST_5_1MM_RA]  58.67,114.68 270 top
J173  QWIIC_RA  [JST04_1MM_RA]  71.37,114.68 90 top
J174  [1X01]  65.02,113.41 0 top
J175  ESLOV RA  [JST_5_1MM_RA]  82.04,114.68 270 top
J176  QWIIC_RA  [JST04_1MM_RA]  94.74,114.68 90 top
J177  [1X01]  88.39,113.41 0 top
J178  ESLOV RA  [JST_5_1MM_RA]  105.41,114.68 270 top
J179  QWIIC_RA  [JST04_1MM_RA]  118.11,114.68 90 top
J180  [1X01]  111.76,113.41 0 top
LOGO1  SFE_LOGO_NAME_FLAME.1_INCH  [SFE_LOGO_NAME_FLAME_.1]  18.29,13.46 180 bottom
LOGO2  OSHW-LOGOMINI  [OSHW-LOGO-MINI]  14.22,8.38 0 top
LOGO3  QWIIC_LOGO_CONNECTOR  [QWIIC_5.5MM]  28.45,11.3 270 bottom
LOGO4  SFE_LOGO_NAME_FLAME.1_INCH  [SFE_LOGO_NAME_FLAME_.1]  41.66,13.46 180 bottom
LOGO5  OSHW-LOGOMINI  [OSHW-LOGO-MINI]  37.59,8.38 0 top
LOGO6  QWIIC_LOGO_CONNECTOR  [QWIIC_5.5MM]  51.82,11.3 270 bottom
LOGO7  SFE_LOGO_NAME_FLAME.1_INCH  [SFE_LOGO_NAME_FLAME_.1]  65.02,13.46 180 bottom
LOGO8  OSHW-LOGOMINI  [OSHW-LOGO-MINI]  60.96,8.38 0 top
LOGO9  QWIIC_LOGO_CONNECTOR  [QWIIC_5.5MM]  75.18,11.3 270 bottom
LOGO10  SFE_LOGO_NAME_FLAME.1_INCH  [SFE_LOGO_NAME_FLAME_.1]  88.39,13.46 180 bottom
LOGO11  OSHW-LOGOMINI  [OSHW-LOGO-MINI]  84.33,8.38 0 top
LOGO12  QWIIC_LOGO_CONNECTOR  [QWIIC_5.5MM]  98.55,11.3 270 bottom
LOGO13  SFE_LOGO_NAME_FLAME.1_INCH  [SFE_LOGO_NAME_FLAME_.1]  111.76,13.46 180 bottom
LOGO14  OSHW-LOGOMINI  [OSHW-LOGO-MINI]  107.7,8.38 0 top
LOGO15  QWIIC_LOGO_CONNECTOR  [QWIIC_5.5MM]  121.92,11.3 270 bottom
LOGO16  SFE_LOGO_NAME_FLAME.1_INCH  [SFE_LOGO_NAME_FLAME_.1]  18.29,22.86 180 bottom
LOGO17  OSHW-LOGOMINI  [OSHW-LOGO-MINI]  14.22,17.78 0 top
LOGO18  QWIIC_LOGO_CONNECTOR  [QWIIC_5.5MM]  28.45,20.7 270 bottom
LOGO19  SFE_LOGO_NAME_FLAME.1_INCH  [SFE_LOGO_NAME_FLAME_.1]  41.66,22.86 180 bottom
LOGO20  OSHW-LOGOMINI  [OSHW-LOGO-MINI]  37.59,17.78 0 top
LOGO21  QWIIC_LOGO_CONNECTOR  [QWIIC_5.5MM]  51.82,20.7 270 bottom
LOGO22  SFE_LOGO_NAME_FLAME.1_INCH  [SFE_LOGO_NAME_FLAME_.1]  65.02,22.86 180 bottom
LOGO23  OSHW-LOGOMINI  [OSHW-LOGO-MINI]  60.96,17.78 0 top
LOGO24  QWIIC_LOGO_CONNECTOR  [QWIIC_5.5MM]  75.18,20.7 270 bottom
LOGO25  SFE_LOGO_NAME_FLAME.1_INCH  [SFE_LOGO_NAME_FLAME_.1]  88.39,22.86 180 bottom
LOGO26  OSHW-LOGOMINI  [OSHW-LOGO-MINI]  84.33,17.78 0 top
LOGO27  QWIIC_LOGO_CONNECTOR  [QWIIC_5.5MM]  98.55,20.7 270 bottom
LOGO28  SFE_LOGO_NAME_FLAME.1_INCH  [SFE_LOGO_NAME_FLAME_.1]  111.76,22.86 180 bottom
LOGO29  OSHW-LOGOMINI  [OSHW-LOGO-MINI]  107.7,17.78 0 top
LOGO30  QWIIC_LOGO_CONNECTOR  [QWIIC_5.5MM]  121.92,20.7 270 bottom
LOGO31  SFE_LOGO_NAME_FLAME.1_INCH  [SFE_LOGO_NAME_FLAME_.1]  18.29,32.26 180 bottom
LOGO32  OSHW-LOGOMINI  [OSHW-LOGO-MINI]  14.22,27.18 0 top
LOGO33  QWIIC_LOGO_CONNECTOR  [QWIIC_5.5MM]  28.45,30.1 270 bottom
LOGO34  SFE_LOGO_NAME_FLAME.1_INCH  [SFE_LOGO_NAME_FLAME_.1]  41.66,32.26 180 bottom
LOGO35  OSHW-LOGOMINI  [OSHW-LOGO-MINI]  37.59,27.18 0 top
LOGO36  QWIIC_LOGO_CONNECTOR  [QWIIC_5.5MM]  51.82,30.1 270 bottom
LOGO37  SFE_LOGO_NAME_FLAME.1_INCH  [SFE_LOGO_NAME_FLAME_.1]  65.02,32.26 180 bottom
LOGO38  OSHW-LOGOMINI  [OSHW-LOGO-MINI]  60.96,27.18 0 top
LOGO39  QWIIC_LOGO_CONNECTOR  [QWIIC_5.5MM]  75.18,30.1 270 bottom
LOGO40  SFE_LOGO_NAME_FLAME.1_INCH  [SFE_LOGO_NAME_FLAME_.1]  88.39,32.26 180 bottom
LOGO41  OSHW-LOGOMINI  [OSHW-LOGO-MINI]  84.33,27.18 0 top
LOGO42  QWIIC_LOGO_CONNECTOR  [QWIIC_5.5MM]  98.55,30.1 270 bottom
LOGO43  SFE_LOGO_NAME_FLAME.1_INCH  [SFE_LOGO_NAME_FLAME_.1]  111.76,32.26 180 bottom
LOGO44  OSHW-LOGOMINI  [OSHW-LOGO-MINI]  107.7,27.18 0 top
LOGO45  QWIIC_LOGO_CONNECTOR  [QWIIC_5.5MM]  121.92,30.1 270 bottom
LOGO46  SFE_LOGO_NAME_FLAME.1_INCH  [SFE_LOGO_NAME_FLAME_.1]  18.29,41.66 180 bottom
LOGO47  OSHW-LOGOMINI  [OSHW-LOGO-MINI]  14.22,36.58 0 top
LOGO48  QWIIC_LOGO_CONNECTOR  [QWIIC_5.5MM]  28.45,39.5 270 bottom
LOGO49  SFE_LOGO_NAME_FLAME.1_INCH  [SFE_LOGO_NAME_FLAME_.1]  41.66,41.66 180 bottom
LOGO50  OSHW-LOGOMINI  [OSHW-LOGO-MINI]  37.59,36.58 0 top
LOGO51  QWIIC_LOGO_CONNECTOR  [QWIIC_5.5MM]  51.82,39.5 270 bottom
LOGO52  SFE_LOGO_NAME_FLAME.1_INCH  [SFE_LOGO_NAME_FLAME_.1]  65.02,41.66 180 bottom
LOGO53  OSHW-LOGOMINI  [OSHW-LOGO-MINI]  60.96,36.58 0 top
LOGO54  QWIIC_LOGO_CONNECTOR  [QWIIC_5.5MM]  75.18,39.5 270 bottom
LOGO55  SFE_LOGO_NAME_FLAME.1_INCH  [SFE_LOGO_NAME_FLAME_.1]  88.39,41.66 180 bottom
LOGO56  OSHW-LOGOMINI  [OSHW-LOGO-MINI]  84.33,36.58 0 top
LOGO57  QWIIC_LOGO_CONNECTOR  [QWIIC_5.5MM]  98.55,39.5 270 bottom
LOGO58  SFE_LOGO_NAME_FLAME.1_INCH  [SFE_LOGO_NAME_FLAME_.1]  111.76,41.66 180 bottom
LOGO59  OSHW-LOGOMINI  [OSHW-LOGO-MINI]  107.7,36.58 0 top
LOGO60  QWIIC_LOGO_CONNECTOR  [QWIIC_5.5MM]  121.92,39.5 270 bottom
LOGO61  SFE_LOGO_NAME_FLAME.1_INCH  [SFE_LOGO_NAME_FLAME_.1]  18.29,51.05 180 bottom
LOGO62  OSHW-LOGOMINI  [OSHW-LOGO-MINI]  14.22,45.97 0 top
LOGO63  QWIIC_LOGO_CONNECTOR  [QWIIC_5.5MM]  28.45,48.89 270 bottom
LOGO64  SFE_LOGO_NAME_FLAME.1_INCH  [SFE_LOGO_NAME_FLAME_.1]  41.66,51.05 180 bottom
LOGO65  OSHW-LOGOMINI  [OSHW-LOGO-MINI]  37.59,45.97 0 top
LOGO66  QWIIC_LOGO_CONNECTOR  [QWIIC_5.5MM]  51.82,48.89 270 bottom
LOGO67  SFE_LOGO_NAME_FLAME.1_INCH  [SFE_LOGO_NAME_FLAME_.1]  65.02,51.05 180 bottom
LOGO68  OSHW-LOGOMINI  [OSHW-LOGO-MINI]  60.96,45.97 0 top
LOGO69  QWIIC_LOGO_CONNECTOR  [QWIIC_5.5MM]  75.18,48.89 270 bottom
LOGO70  SFE_LOGO_NAME_FLAME.1_INCH  [SFE_LOGO_NAME_FLAME_.1]  88.39,51.05 180 bottom
LOGO71  OSHW-LOGOMINI  [OSHW-LOGO-MINI]  84.33,45.97 0 top
LOGO72  QWIIC_LOGO_CONNECTOR  [QWIIC_5.5MM]  98.55,48.89 270 bottom
LOGO73  SFE_LOGO_NAME_FLAME.1_INCH  [SFE_LOGO_NAME_FLAME_.1]  111.76,51.05 180 bottom
LOGO74  OSHW-LOGOMINI  [OSHW-LOGO-MINI]  107.7,45.97 0 top
LOGO75  QWIIC_LOGO_CONNECTOR  [QWIIC_5.5MM]  121.92,48.89 270 bottom
LOGO76  SFE_LOGO_NAME_FLAME.1_INCH  [SFE_LOGO_NAME_FLAME_.1]  18.29,60.45 180 bottom
LOGO77  OSHW-LOGOMINI  [OSHW-LOGO-MINI]  14.22,55.37 0 top
LOGO78  QWIIC_LOGO_CONNECTOR  [QWIIC_5.5MM]  28.45,58.29 270 bottom
LOGO79  SFE_LOGO_NAME_FLAME.1_INCH  [SFE_LOGO_NAME_FLAME_.1]  41.66,60.45 180 bottom
LOGO80  OSHW-LOGOMINI  [OSHW-LOGO-MINI]  37.59,55.37 0 top
LOGO81  QWIIC_LOGO_CONNECTOR  [QWIIC_5.5MM]  51.82,58.29 270 bottom
LOGO82  SFE_LOGO_NAME_FLAME.1_INCH  [SFE_LOGO_NAME_FLAME_.1]  65.02,60.45 180 bottom
LOGO83  OSHW-LOGOMINI  [OSHW-LOGO-MINI]  60.96,55.37 0 top
LOGO84  QWIIC_LOGO_CONNECTOR  [QWIIC_5.5MM]  75.18,58.29 270 bottom
LOGO85  SFE_LOGO_NAME_FLAME.1_INCH  [SFE_LOGO_NAME_FLAME_.1]  88.39,60.45 180 bottom
LOGO86  OSHW-LOGOMINI  [OSHW-LOGO-MINI]  84.33,55.37 0 top
LOGO87  QWIIC_LOGO_CONNECTOR  [QWIIC_5.5MM]  98.55,58.29 270 bottom
LOGO88  SFE_LOGO_NAME_FLAME.1_INCH  [SFE_LOGO_NAME_FLAME_.1]  111.76,60.45 180 bottom
LOGO89  OSHW-LOGOMINI  [OSHW-LOGO-MINI]  107.7,55.37 0 top
LOGO90  QWIIC_LOGO_CONNECTOR  [QWIIC_5.5MM]  121.92,58.29 270 bottom
LOGO91  SFE_LOGO_NAME_FLAME.1_INCH  [SFE_LOGO_NAME_FLAME_.1]  18.29,69.85 180 bottom
LOGO92  OSHW-LOGOMINI  [OSHW-LOGO-MINI]  14.22,64.77 0 top
LOGO93  QWIIC_LOGO_CONNECTOR  [QWIIC_5.5MM]  28.45,67.69 270 bottom
LOGO94  SFE_LOGO_NAME_FLAME.1_INCH  [SFE_LOGO_NAME_FLAME_.1]  41.66,69.85 180 bottom
LOGO95  OSHW-LOGOMINI  [OSHW-LOGO-MINI]  37.59,64.77 0 top
LOGO96  QWIIC_LOGO_CONNECTOR  [QWIIC_5.5MM]  51.82,67.69 270 bottom
LOGO97  SFE_LOGO_NAME_FLAME.1_INCH  [SFE_LOGO_NAME_FLAME_.1]  65.02,69.85 180 bottom
LOGO98  OSHW-LOGOMINI  [OSHW-LOGO-MINI]  60.96,64.77 0 top
LOGO99  QWIIC_LOGO_CONNECTOR  [QWIIC_5.5MM]  75.18,67.69 270 bottom
LOGO100  SFE_LOGO_NAME_FLAME.1_INCH  [SFE_LOGO_NAME_FLAME_.1]  88.39,69.85 180 bottom
LOGO101  OSHW-LOGOMINI  [OSHW-LOGO-MINI]  84.33,64.77 0 top
LOGO102  QWIIC_LOGO_CONNECTOR  [QWIIC_5.5MM]  98.55,67.69 270 bottom
LOGO103  SFE_LOGO_NAME_FLAME.1_INCH  [SFE_LOGO_NAME_FLAME_.1]  111.76,69.85 180 bottom
LOGO104  OSHW-LOGOMINI  [OSHW-LOGO-MINI]  107.7,64.77 0 top
LOGO105  QWIIC_LOGO_CONNECTOR  [QWIIC_5.5MM]  121.92,67.69 270 bottom
LOGO106  SFE_LOGO_NAME_FLAME.1_INCH  [SFE_LOGO_NAME_FLAME_.1]  18.29,79.25 180 bottom
LOGO107  OSHW-LOGOMINI  [OSHW-LOGO-MINI]  14.22,74.17 0 top
LOGO108  QWIIC_LOGO_CONNECTOR  [QWIIC_5.5MM]  28.45,77.09 270 bottom
LOGO109  SFE_LOGO_NAME_FLAME.1_INCH  [SFE_LOGO_NAME_FLAME_.1]  41.66,79.25 180 bottom
LOGO110  OSHW-LOGOMINI  [OSHW-LOGO-MINI]  37.59,74.17 0 top
LOGO111  QWIIC_LOGO_CONNECTOR  [QWIIC_5.5MM]  51.82,77.09 270 bottom
LOGO112  SFE_LOGO_NAME_FLAME.1_INCH  [SFE_LOGO_NAME_FLAME_.1]  65.02,79.25 180 bottom
LOGO113  OSHW-LOGOMINI  [OSHW-LOGO-MINI]  60.96,74.17 0 top
LOGO114  QWIIC_LOGO_CONNECTOR  [QWIIC_5.5MM]  75.18,77.09 270 bottom
LOGO115  SFE_LOGO_NAME_FLAME.1_INCH  [SFE_LOGO_NAME_FLAME_.1]  88.39,79.25 180 bottom
LOGO116  OSHW-LOGOMINI  [OSHW-LOGO-MINI]  84.33,74.17 0 top
LOGO117  QWIIC_LOGO_CONNECTOR  [QWIIC_5.5MM]  98.55,77.09 270 bottom
LOGO118  SFE_LOGO_NAME_FLAME.1_INCH  [SFE_LOGO_NAME_FLAME_.1]  111.76,79.25 180 bottom
LOGO119  OSHW-LOGOMINI  [OSHW-LOGO-MINI]  107.7,74.17 0 top
LOGO120  QWIIC_LOGO_CONNECTOR  [QWIIC_5.5MM]  121.92,77.09 270 bottom
LOGO121  SFE_LOGO_NAME_FLAME.1_INCH  [SFE_LOGO_NAME_FLAME_.1]  18.29,88.65 180 bottom
LOGO122  OSHW-LOGOMINI  [OSHW-LOGO-MINI]  14.22,83.57 0 top
LOGO123  QWIIC_LOGO_CONNECTOR  [QWIIC_5.5MM]  28.45,86.49 270 bottom
LOGO124  SFE_LOGO_NAME_FLAME.1_INCH  [SFE_LOGO_NAME_FLAME_.1]  41.66,88.65 180 bottom
LOGO125  OSHW-LOGOMINI  [OSHW-LOGO-MINI]  37.59,83.57 0 top
LOGO126  QWIIC_LOGO_CONNECTOR  [QWIIC_5.5MM]  51.82,86.49 270 bottom
LOGO127  SFE_LOGO_NAME_FLAME.1_INCH  [SFE_LOGO_NAME_FLAME_.1]  65.02,88.65 180 bottom
LOGO128  OSHW-LOGOMINI  [OSHW-LOGO-MINI]  60.96,83.57 0 top
LOGO129  QWIIC_LOGO_CONNECTOR  [QWIIC_5.5MM]  75.18,86.49 270 bottom
LOGO130  SFE_LOGO_NAME_FLAME.1_INCH  [SFE_LOGO_NAME_FLAME_.1]  88.39,88.65 180 bottom
LOGO131  OSHW-LOGOMINI  [OSHW-LOGO-MINI]  84.33,83.57 0 top
LOGO132  QWIIC_LOGO_CONNECTOR  [QWIIC_5.5MM]  98.55,86.49 270 bottom
LOGO133  SFE_LOGO_NAME_FLAME.1_INCH  [SFE_LOGO_NAME_FLAME_.1]  111.76,88.65 180 bottom
LOGO134  OSHW-LOGOMINI  [OSHW-LOGO-MINI]  107.7,83.57 0 top
LOGO135  QWIIC_LOGO_CONNECTOR  [QWIIC_5.5MM]  121.92,86.49 270 bottom
LOGO136  SFE_LOGO_NAME_FLAME.1_INCH  [SFE_LOGO_NAME_FLAME_.1]  18.29,98.04 180 bottom
LOGO137  OSHW-LOGOMINI  [OSHW-LOGO-MINI]  14.22,92.96 0 top
LOGO138  QWIIC_LOGO_CONNECTOR  [QWIIC_5.5MM]  28.45,95.89 270 bottom
LOGO139  SFE_LOGO_NAME_FLAME.1_INCH  [SFE_LOGO_NAME_FLAME_.1]  41.66,98.04 180 bottom
LOGO140  OSHW-LOGOMINI  [OSHW-LOGO-MINI]  37.59,92.96 0 top
LOGO141  QWIIC_LOGO_CONNECTOR  [QWIIC_5.5MM]  51.82,95.89 270 bottom
LOGO142  SFE_LOGO_NAME_FLAME.1_INCH  [SFE_LOGO_NAME_FLAME_.1]  65.02,98.04 180 bottom
LOGO143  OSHW-LOGOMINI  [OSHW-LOGO-MINI]  60.96,92.96 0 top
LOGO144  QWIIC_LOGO_CONNECTOR  [QWIIC_5.5MM]  75.18,95.89 270 bottom
LOGO145  SFE_LOGO_NAME_FLAME.1_INCH  [SFE_LOGO_NAME_FLAME_.1]  88.39,98.04 180 bottom
LOGO146  OSHW-LOGOMINI  [OSHW-LOGO-MINI]  84.33,92.96 0 top
LOGO147  QWIIC_LOGO_CONNECTOR  [QWIIC_5.5MM]  98.55,95.89 270 bottom
LOGO148  SFE_LOGO_NAME_FLAME.1_INCH  [SFE_LOGO_NAME_FLAME_.1]  111.76,98.04 180 bottom
LOGO149  OSHW-LOGOMINI  [OSHW-LOGO-MINI]  107.7,92.96 0 top
LOGO150  QWIIC_LOGO_CONNECTOR  [QWIIC_5.5MM]  121.92,95.89 270 bottom
LOGO151  SFE_LOGO_NAME_FLAME.1_INCH  [SFE_LOGO_NAME_FLAME_.1]  18.29,107.44 180 bottom
LOGO152  OSHW-LOGOMINI  [OSHW-LOGO-MINI]  14.22,102.36 0 top
LOGO153  QWIIC_LOGO_CONNECTOR  [QWIIC_5.5MM]  28.45,105.28 270 bottom
LOGO154  SFE_LOGO_NAME_FLAME.1_INCH  [SFE_LOGO_NAME_FLAME_.1]  41.66,107.44 180 bottom
LOGO155  OSHW-LOGOMINI  [OSHW-LOGO-MINI]  37.59,102.36 0 top
LOGO156  QWIIC_LOGO_CONNECTOR  [QWIIC_5.5MM]  51.82,105.28 270 bottom
LOGO157  SFE_LOGO_NAME_FLAME.1_INCH  [SFE_LOGO_NAME_FLAME_.1]  65.02,107.44 180 bottom
LOGO158  OSHW-LOGOMINI  [OSHW-LOGO-MINI]  60.96,102.36 0 top
LOGO159  QWIIC_LOGO_CONNECTOR  [QWIIC_5.5MM]  75.18,105.28 270 bottom
LOGO160  SFE_LOGO_NAME_FLAME.1_INCH  [SFE_LOGO_NAME_FLAME_.1]  88.39,107.44 180 bottom
LOGO161  OSHW-LOGOMINI  [OSHW-LOGO-MINI]  84.33,102.36 0 top
LOGO162  QWIIC_LOGO_CONNECTOR  [QWIIC_5.5MM]  98.55,105.28 270 bottom
LOGO163  SFE_LOGO_NAME_FLAME.1_INCH  [SFE_LOGO_NAME_FLAME_.1]  111.76,107.44 180 bottom
LOGO164  OSHW-LOGOMINI  [OSHW-LOGO-MINI]  107.7,102.36 0 top
LOGO165  QWIIC_LOGO_CONNECTOR  [QWIIC_5.5MM]  121.92,105.28 270 bottom
LOGO166  SFE_LOGO_NAME_FLAME.1_INCH  [SFE_LOGO_NAME_FLAME_.1]  18.29,116.84 180 bottom
LOGO167  OSHW-LOGOMINI  [OSHW-LOGO-MINI]  14.22,111.76 0 top
LOGO168  QWIIC_LOGO_CONNECTOR  [QWIIC_5.5MM]  28.45,114.68 270 bottom
LOGO169  SFE_LOGO_NAME_FLAME.1_INCH  [SFE_LOGO_NAME_FLAME_.1]  41.66,116.84 180 bottom
LOGO170  OSHW-LOGOMINI  [OSHW-LOGO-MINI]  37.59,111.76 0 top
LOGO171  QWIIC_LOGO_CONNECTOR  [QWIIC_5.5MM]  51.82,114.68 270 bottom
LOGO172  SFE_LOGO_NAME_FLAME.1_INCH  [SFE_LOGO_NAME_FLAME_.1]  65.02,116.84 180 bottom
LOGO173  OSHW-LOGOMINI  [OSHW-LOGO-MINI]  60.96,111.76 0 top
LOGO174  QWIIC_LOGO_CONNECTOR  [QWIIC_5.5MM]  75.18,114.68 270 bottom
LOGO175  SFE_LOGO_NAME_FLAME.1_INCH  [SFE_LOGO_NAME_FLAME_.1]  88.39,116.84 180 bottom
LOGO176  OSHW-LOGOMINI  [OSHW-LOGO-MINI]  84.33,111.76 0 top
LOGO177  QWIIC_LOGO_CONNECTOR  [QWIIC_5.5MM]  98.55,114.68 270 bottom
LOGO178  SFE_LOGO_NAME_FLAME.1_INCH  [SFE_LOGO_NAME_FLAME_.1]  111.76,116.84 180 bottom
LOGO179  OSHW-LOGOMINI  [OSHW-LOGO-MINI]  107.7,111.76 0 top
LOGO180  QWIIC_LOGO_CONNECTOR  [QWIIC_5.5MM]  121.92,114.68 270 bottom
U1  3.3V  [SOT23-5]  18.29,13.21 270 top
U2  3.3V  [SOT23-5]  41.66,13.21 270 top
U3  3.3V  [SOT23-5]  65.02,13.21 270 top
U4  3.3V  [SOT23-5]  88.39,13.21 270 top
U5  3.3V  [SOT23-5]  111.76,13.21 270 top
U6  3.3V  [SOT23-5]  18.29,22.61 270 top
U7  3.3V  [SOT23-5]  41.66,22.61 270 top
U8  3.3V  [SOT23-5]  65.02,22.61 270 top
U9  3.3V  [SOT23-5]  88.39,22.61 270 top
U10  3.3V  [SOT23-5]  111.76,22.61 270 top
U11  3.3V  [SOT23-5]  18.29,32 270 top
U12  3.3V  [SOT23-5]  41.66,32 270 top
U13  3.3V  [SOT23-5]  65.02,32 270 top
U14  3.3V  [SOT23-5]  88.39,32 270 top
U15  3.3V  [SOT23-5]  111.76,32 270 top
U16  3.3V  [SOT23-5]  18.29,41.4 270 top
U17  3.3V  [SOT23-5]  41.66,41.4 270 top
U18  3.3V  [SOT23-5]  65.02,41.4 270 top
U19  3.3V  [SOT23-5]  88.39,41.4 270 top
U20  3.3V  [SOT23-5]  111.76,41.4 270 top
U21  3.3V  [SOT23-5]  18.29,50.8 270 top
U22  3.3V  [SOT23-5]  41.66,50.8 270 top
U23  3.3V  [SOT23-5]  65.02,50.8 270 top
U24  3.3V  [SOT23-5]  88.39,50.8 270 top
U25  3.3V  [SOT23-5]  111.76,50.8 270 top
U26  3.3V  [SOT23-5]  18.29,60.2 270 top
U27  3.3V  [SOT23-5]  41.66,60.2 270 top
U28  3.3V  [SOT23-5]  65.02,60.2 270 top
U29  3.3V  [SOT23-5]  88.39,60.2 270 top
U30  3.3V  [SOT23-5]  111.76,60.2 270 top
U31  3.3V  [SOT23-5]  18.29,69.6 270 top
U32  3.3V  [SOT23-5]  41.66,69.6 270 top
U33  3.3V  [SOT23-5]  65.02,69.6 270 top
U34  3.3V  [SOT23-5]  88.39,69.6 270 top
U35  3.3V  [SOT23-5]  111.76,69.6 270 top
U36  3.3V  [SOT23-5]  18.29,78.99 270 top
U37  3.3V  [SOT23-5]  41.66,78.99 270 top
U38  3.3V  [SOT23-5]  65.02,78.99 270 top
U39  3.3V  [SOT23-5]  88.39,78.99 270 top
U40  3.3V  [SOT23-5]  111.76,78.99 270 top
U41  3.3V  [SOT23-5]  18.29,88.39 270 top
U42  3.3V  [SOT23-5]  41.66,88.39 270 top
U43  3.3V  [SOT23-5]  65.02,88.39 270 top
U44  3.3V  [SOT23-5]  88.39,88.39 270 top
U45  3.3V  [SOT23-5]  111.76,88.39 270 top
U46  3.3V  [SOT23-5]  18.29,97.79 270 top
U47  3.3V  [SOT23-5]  41.66,97.79 270 top
U48  3.3V  [SOT23-5]  65.02,97.79 270 top
U49  3.3V  [SOT23-5]  88.39,97.79 270 top
U50  3.3V  [SOT23-5]  111.76,97.79 270 top
U51  3.3V  [SOT23-5]  18.29,107.19 270 top
U52  3.3V  [SOT23-5]  41.66,107.19 270 top
U53  3.3V  [SOT23-5]  65.02,107.19 270 top
U54  3.3V  [SOT23-5]  88.39,107.19 270 top
U55  3.3V  [SOT23-5]  111.76,107.19 270 top
U56  3.3V  [SOT23-5]  18.29,116.59 270 top
U57  3.3V  [SOT23-5]  41.66,116.59 270 top
U58  3.3V  [SOT23-5]  65.02,116.59 270 top
U59  3.3V  [SOT23-5]  88.39,116.59 270 top
U60  3.3V  [SOT23-5]  111.76,116.59 270 top
U$1  [#INT#0]  18.29,8.13 0 top
U$2  [ESLOV0]  7.75,11.3 270 bottom
U$3  [SFE_LOGO_FLAME_STOP_.1]  22.48,8.64 0 top
U$4  [ESLOV_TO_QWIIC_BRIDGE0]  18.29,7.87 180 bottom
U$5  [#INT#0]  41.66,8.13 0 top
U$6  [SFE_LOGO_FLAME_STOP_.1]  45.85,8.64 0 top
U$7  [ESLOV0]  31.12,11.3 270 bottom
U$8  [ESLOV_TO_QWIIC_BRIDGE0]  41.66,7.87 180 bottom
U$9  [#INT#0]  65.02,8.13 0 top
U$10  [SFE_LOGO_FLAME_STOP_.1]  69.22,8.64 0 top
U$11  [ESLOV0]  54.48,11.3 270 bottom
U$12  [ESLOV_TO_QWIIC_BRIDGE0]  65.02,7.87 180 bottom
U$13  [#INT#0]  88.39,8.13 0 top
U$14  [SFE_LOGO_FLAME_STOP_.1]  92.58,8.64 0 top
U$15  [ESLOV0]  77.85,11.3 270 bottom
U$16  [ESLOV_TO_QWIIC_BRIDGE0]  88.39,7.87 180 bottom
U$17  [#INT#0]  111.76,8.13 0 top
U$18  [SFE_LOGO_FLAME_STOP_.1]  115.95,8.64 0 top
U$19  [ESLOV0]  101.22,11.3 270 bottom
U$20  [ESLOV_TO_QWIIC_BRIDGE0]  111.76,7.87 180 bottom
U$21  [#INT#0]  18.29,17.53 0 top
U$22  [SFE_LOGO_FLAME_STOP_.1]  22.48,18.03 0 top
U$23  [ESLOV0]  7.75,20.7 270 bottom
U$24  [ESLOV_TO_QWIIC_BRIDGE0]  18.29,17.27 180 bottom
U$25  [#INT#0]  41.66,17.53 0 top
U$26  [SFE_LOGO_FLAME_STOP_.1]  45.85,18.03 0 top
U$27  [ESLOV0]  31.12,20.7 270 bottom
U$28  [ESLOV_TO_QWIIC_BRIDGE0]  41.66,17.27 180 bottom
U$29  [#INT#0]  65.02,17.53 0 top
U$30  [SFE_LOGO_FLAME_STOP_.1]  69.22,18.03 0 top
U$31  [ESLOV0]  54.48,20.7 270 bottom
U$32  [ESLOV_TO_QWIIC_BRIDGE0]  65.02,17.27 180 bottom
U$33  [#INT#0]  88.39,17.53 0 top
U$34  [SFE_LOGO_FLAME_STOP_.1]  92.58,18.03 0 top
U$35  [ESLOV0]  77.85,20.7 270 bottom
U$36  [ESLOV_TO_QWIIC_BRIDGE0]  88.39,17.27 180 bottom
U$37  [#INT#0]  111.76,17.53 0 top
U$38  [SFE_LOGO_FLAME_STOP_.1]  115.95,18.03 0 top
U$39  [ESLOV0]  101.22,20.7 270 bottom
U$40  [ESLOV_TO_QWIIC_BRIDGE0]  111.76,17.27 180 bottom
U$41  [#INT#0]  18.29,26.92 0 top
U$42  [SFE_LOGO_FLAME_STOP_.1]  22.48,27.43 0 top
U$43  [ESLOV0]  7.75,30.1 270 bottom
U$44  [ESLOV_TO_QWIIC_BRIDGE0]  18.29,26.67 180 bottom
U$45  [#INT#0]  41.66,26.92 0 top
U$46  [SFE_LOGO_FLAME_STOP_.1]  45.85,27.43 0 top
U$47  [ESLOV0]  31.12,30.1 270 bottom
U$48  [ESLOV_TO_QWIIC_BRIDGE0]  41.66,26.67 180 bottom
U$49  [#INT#0]  65.02,26.92 0 top
U$50  [SFE_LOGO_FLAME_STOP_.1]  69.22,27.43 0 top
U$51  [ESLOV0]  54.48,30.1 270 bottom
U$52  [ESLOV_TO_QWIIC_BRIDGE0]  65.02,26.67 180 bottom
U$53  [#INT#0]  88.39,26.92 0 top
U$54  [SFE_LOGO_FLAME_STOP_.1]  92.58,27.43 0 top
U$55  [ESLOV0]  77.85,30.1 270 bottom
U$56  [ESLOV_TO_QWIIC_BRIDGE0]  88.39,26.67 180 bottom
U$57  [#INT#0]  111.76,26.92 0 top
U$58  [SFE_LOGO_FLAME_STOP_.1]  115.95,27.43 0 top
U$59  [ESLOV0]  101.22,30.1 270 bottom
U$60  [ESLOV_TO_QWIIC_BRIDGE0]  111.76,26.67 180 bottom
U$61  [#INT#0]  18.29,36.32 0 top
U$62  [SFE_LOGO_FLAME_STOP_.1]  22.48,36.83 0 top
U$63  [ESLOV0]  7.75,39.5 270 bottom
U$64  [ESLOV_TO_QWIIC_BRIDGE0]  18.29,36.07 180 bottom
U$65  [#INT#0]  41.66,36.32 0 top
U$66  [SFE_LOGO_FLAME_STOP_.1]  45.85,36.83 0 top
U$67  [ESLOV0]  31.12,39.5 270 bottom
U$68  [ESLOV_TO_QWIIC_BRIDGE0]  41.66,36.07 180 bottom
U$69  [#INT#0]  65.02,36.32 0 top
U$70  [SFE_LOGO_FLAME_STOP_.1]  69.22,36.83 0 top
U$71  [ESLOV0]  54.48,39.5 270 bottom
U$72  [ESLOV_TO_QWIIC_BRIDGE0]  65.02,36.07 180 bottom
U$73  [#INT#0]  88.39,36.32 0 top
U$74  [SFE_LOGO_FLAME_STOP_.1]  92.58,36.83 0 top
U$75  [ESLOV0]  77.85,39.5 270 bottom
U$76  [ESLOV_TO_QWIIC_BRIDGE0]  88.39,36.07 180 bottom
U$77  [#INT#0]  111.76,36.32 0 top
U$78  [SFE_LOGO_FLAME_STOP_.1]  115.95,36.83 0 top
U$79  [ESLOV0]  101.22,39.5 270 bottom
U$80  [ESLOV_TO_QWIIC_BRIDGE0]  111.76,36.07 180 bottom
U$81  [#INT#0]  18.29,45.72 0 top
U$82  [SFE_LOGO_FLAME_STOP_.1]  22.48,46.23 0 top
U$83  [ESLOV0]  7.75,48.89 270 bottom
U$84  [ESLOV_TO_QWIIC_BRIDGE0]  18.29,45.47 180 bottom
U$85  [#INT#0]  41.66,45.72 0 top
U$86  [SFE_LOGO_FLAME_STOP_.1]  45.85,46.23 0 top
U$87  [ESLOV0]  31.12,48.89 270 bottom
U$88  [ESLOV_TO_QWIIC_BRIDGE0]  41.66,45.47 180 bottom
U$89  [#INT#0]  65.02,45.72 0 top
U$90  [SFE_LOGO_FLAME_STOP_.1]  69.22,46.23 0 top
U$91  [ESLOV0]  54.48,48.89 270 bottom
U$92  [ESLOV_TO_QWIIC_BRIDGE0]  65.02,45.47 180 bottom
U$93  [#INT#0]  88.39,45.72 0 top
U$94  [SFE_LOGO_FLAME_STOP_.1]  92.58,46.23 0 top
U$95  [ESLOV0]  77.85,48.89 270 bottom
U$96  [ESLOV_TO_QWIIC_BRIDGE0]  88.39,45.47 180 bottom
U$97  [#INT#0]  111.76,45.72 0 top
U$98  [SFE_LOGO_FLAME_STOP_.1]  115.95,46.23 0 top
U$99  [ESLOV0]  101.22,48.89 270 bottom
U$100  [ESLOV_TO_QWIIC_BRIDGE0]  111.76,45.47 180 bottom
U$101  [#INT#0]  18.29,55.12 0 top
U$102  [SFE_LOGO_FLAME_STOP_.1]  22.48,55.63 0 top
U$103  [ESLOV0]  7.75,58.29 270 bottom
U$104  [ESLOV_TO_QWIIC_BRIDGE0]  18.29,54.86 180 bottom
U$105  [#INT#0]  41.66,55.12 0 top
U$106  [SFE_LOGO_FLAME_STOP_.1]  45.85,55.63 0 top
U$107  [ESLOV0]  31.12,58.29 270 bottom
U$108  [ESLOV_TO_QWIIC_BRIDGE0]  41.66,54.86 180 bottom
U$109  [#INT#0]  65.02,55.12 0 top
U$110  [SFE_LOGO_FLAME_STOP_.1]  69.22,55.63 0 top
U$111  [ESLOV0]  54.48,58.29 270 bottom
U$112  [ESLOV_TO_QWIIC_BRIDGE0]  65.02,54.86 180 bottom
U$113  [#INT#0]  88.39,55.12 0 top
U$114  [SFE_LOGO_FLAME_STOP_.1]  92.58,55.63 0 top
U$115  [ESLOV0]  77.85,58.29 270 bottom
U$116  [ESLOV_TO_QWIIC_BRIDGE0]  88.39,54.86 180 bottom
U$117  [#INT#0]  111.76,55.12 0 top
U$118  [SFE_LOGO_FLAME_STOP_.1]  115.95,55.63 0 top
U$119  [ESLOV0]  101.22,58.29 270 bottom
U$120  [ESLOV_TO_QWIIC_BRIDGE0]  111.76,54.86 180 bottom
U$121  [#INT#0]  18.29,64.52 0 top
U$122  [SFE_LOGO_FLAME_STOP_.1]  22.48,65.02 0 top
U$123  [ESLOV0]  7.75,67.69 270 bottom
U$124  [ESLOV_TO_QWIIC_BRIDGE0]  18.29,64.26 180 bottom
U$125  [#INT#0]  41.66,64.52 0 top
U$126  [SFE_LOGO_FLAME_STOP_.1]  45.85,65.02 0 top
U$127  [ESLOV0]  31.12,67.69 270 bottom
U$128  [ESLOV_TO_QWIIC_BRIDGE0]  41.66,64.26 180 bottom
U$129  [#INT#0]  65.02,64.52 0 top
U$130  [SFE_LOGO_FLAME_STOP_.1]  69.22,65.02 0 top
U$131  [ESLOV0]  54.48,67.69 270 bottom
U$132  [ESLOV_TO_QWIIC_BRIDGE0]  65.02,64.26 180 bottom
U$133  [#INT#0]  88.39,64.52 0 top
U$134  [SFE_LOGO_FLAME_STOP_.1]  92.58,65.02 0 top
U$135  [ESLOV0]  77.85,67.69 270 bottom
U$136  [ESLOV_TO_QWIIC_BRIDGE0]  88.39,64.26 180 bottom
U$137  [#INT#0]  111.76,64.52 0 top
U$138  [SFE_LOGO_FLAME_STOP_.1]  115.95,65.02 0 top
U$139  [ESLOV0]  101.22,67.69 270 bottom
U$140  [ESLOV_TO_QWIIC_BRIDGE0]  111.76,64.26 180 bottom
U$141  [#INT#0]  18.29,73.91 0 top
U$142  [SFE_LOGO_FLAME_STOP_.1]  22.48,74.42 0 top
U$143  [ESLOV0]  7.75,77.09 270 bottom
U$144  [ESLOV_TO_QWIIC_BRIDGE0]  18.29,73.66 180 bottom
U$145  [#INT#0]  41.66,73.91 0 top
U$146  [SFE_LOGO_FLAME_STOP_.1]  45.85,74.42 0 top
U$147  [ESLOV0]  31.12,77.09 270 bottom
U$148  [ESLOV_TO_QWIIC_BRIDGE0]  41.66,73.66 180 bottom
U$149  [#INT#0]  65.02,73.91 0 top
U$150  [SFE_LOGO_FLAME_STOP_.1]  69.22,74.42 0 top
U$151  [ESLOV0]  54.48,77.09 270 bottom
U$152  [ESLOV_TO_QWIIC_BRIDGE0]  65.02,73.66 180 bottom
U$153  [#INT#0]  88.39,73.91 0 top
U$154  [SFE_LOGO_FLAME_STOP_.1]  92.58,74.42 0 top
U$155  [ESLOV0]  77.85,77.09 270 bottom
U$156  [ESLOV_TO_QWIIC_BRIDGE0]  88.39,73.66 180 bottom
U$157  [#INT#0]  111.76,73.91 0 top
U$158  [SFE_LOGO_FLAME_STOP_.1]  115.95,74.42 0 top
U$159  [ESLOV0]  101.22,77.09 270 bottom
U$160  [ESLOV_TO_QWIIC_BRIDGE0]  111.76,73.66 180 bottom
U$161  [#INT#0]  18.29,83.31 0 top
U$162  [SFE_LOGO_FLAME_STOP_.1]  22.48,83.82 0 top
U$163  [ESLOV0]  7.75,86.49 270 bottom
U$164  [ESLOV_TO_QWIIC_BRIDGE0]  18.29,83.06 180 bottom
U$165  [#INT#0]  41.66,83.31 0 top
U$166  [SFE_LOGO_FLAME_STOP_.1]  45.85,83.82 0 top
U$167  [ESLOV0]  31.12,86.49 270 bottom
U$168  [ESLOV_TO_QWIIC_BRIDGE0]  41.66,83.06 180 bottom
U$169  [#INT#0]  65.02,83.31 0 top
U$170  [SFE_LOGO_FLAME_STOP_.1]  69.22,83.82 0 top
U$171  [ESLOV0]  54.48,86.49 270 bottom
U$172  [ESLOV_TO_QWIIC_BRIDGE0]  65.02,83.06 180 bottom
U$173  [#INT#0]  88.39,83.31 0 top
U$174  [SFE_LOGO_FLAME_STOP_.1]  92.58,83.82 0 top
U$175  [ESLOV0]  77.85,86.49 270 bottom
U$176  [ESLOV_TO_QWIIC_BRIDGE0]  88.39,83.06 180 bottom
U$177  [#INT#0]  111.76,83.31 0 top
U$178  [SFE_LOGO_FLAME_STOP_.1]  115.95,83.82 0 top
U$179  [ESLOV0]  101.22,86.49 270 bottom
U$180  [ESLOV_TO_QWIIC_BRIDGE0]  111.76,83.06 180 bottom
U$181  [#INT#0]  18.29,92.71 0 top
U$182  [SFE_LOGO_FLAME_STOP_.1]  22.48,93.22 0 top
U$183  [ESLOV0]  7.75,95.89 270 bottom
U$184  [ESLOV_TO_QWIIC_BRIDGE0]  18.29,92.46 180 bottom
U$185  [#INT#0]  41.66,92.71 0 top
U$186  [SFE_LOGO_FLAME_STOP_.1]  45.85,93.22 0 top
U$187  [ESLOV0]  31.12,95.89 270 bottom
U$188  [ESLOV_TO_QWIIC_BRIDGE0]  41.66,92.46 180 bottom
U$189  [#INT#0]  65.02,92.71 0 top
U$190  [SFE_LOGO_FLAME_STOP_.1]  69.22,93.22 0 top
U$191  [ESLOV0]  54.48,95.89 270 bottom
U$192  [ESLOV_TO_QWIIC_BRIDGE0]  65.02,92.46 180 bottom
U$193  [#INT#0]  88.39,92.71 0 top
U$194  [SFE_LOGO_FLAME_STOP_.1]  92.58,93.22 0 top
U$195  [ESLOV0]  77.85,95.89 270 bottom
U$196  [ESLOV_TO_QWIIC_BRIDGE0]  88.39,92.46 180 bottom
U$197  [#INT#0]  111.76,92.71 0 top
U$198  [SFE_LOGO_FLAME_STOP_.1]  115.95,93.22 0 top
U$199  [ESLOV0]  101.22,95.89 270 bottom
U$200  [ESLOV_TO_QWIIC_BRIDGE0]  111.76,92.46 180 bottom
U$201  [#INT#0]  18.29,102.11 0 top
U$202  [SFE_LOGO_FLAME_STOP_.1]  22.48,102.62 0 top
U$203  [ESLOV0]  7.75,105.28 270 bottom
U$204  [ESLOV_TO_QWIIC_BRIDGE0]  18.29,101.85 180 bottom
U$205  [#INT#0]  41.66,102.11 0 top
U$206  [SFE_LOGO_FLAME_STOP_.1]  45.85,102.62 0 top
U$207  [ESLOV0]  31.12,105.28 270 bottom
U$208  [ESLOV_TO_QWIIC_BRIDGE0]  41.66,101.85 180 bottom
U$209  [#INT#0]  65.02,102.11 0 top
U$210  [SFE_LOGO_FLAME_STOP_.1]  69.22,102.62 0 top
U$211  [ESLOV0]  54.48,105.28 270 bottom
U$212  [ESLOV_TO_QWIIC_BRIDGE0]  65.02,101.85 180 bottom
U$213  [#INT#0]  88.39,102.11 0 top
U$214  [SFE_LOGO_FLAME_STOP_.1]  92.58,102.62 0 top
U$215  [ESLOV0]  77.85,105.28 270 bottom
U$216  [ESLOV_TO_QWIIC_BRIDGE0]  88.39,101.85 180 bottom
U$217  [#INT#0]  111.76,102.11 0 top
U$218  [SFE_LOGO_FLAME_STOP_.1]  115.95,102.62 0 top
U$219  [ESLOV0]  101.22,105.28 270 bottom
U$220  [ESLOV_TO_QWIIC_BRIDGE0]  111.76,101.85 180 bottom
U$221  [#INT#0]  18.29,111.51 0 top
U$222  [SFE_LOGO_FLAME_STOP_.1]  22.48,112.01 0 top
U$223  [ESLOV0]  7.75,114.68 270 bottom
U$224  [ESLOV_TO_QWIIC_BRIDGE0]  18.29,111.25 180 bottom
U$225  [#INT#0]  41.66,111.51 0 top
U$226  [SFE_LOGO_FLAME_STOP_.1]  45.85,112.01 0 top
U$227  [ESLOV0]  31.12,114.68 270 bottom
U$228  [ESLOV_TO_QWIIC_BRIDGE0]  41.66,111.25 180 bottom
U$229  [#INT#0]  65.02,111.51 0 top
U$230  [SFE_LOGO_FLAME_STOP_.1]  69.22,112.01 0 top
U$231  [ESLOV0]  54.48,114.68 270 bottom
U$232  [ESLOV_TO_QWIIC_BRIDGE0]  65.02,111.25 180 bottom
U$233  [#INT#0]  88.39,111.51 0 top
U$234  [SFE_LOGO_FLAME_STOP_.1]  92.58,112.01 0 top
U$235  [ESLOV0]  77.85,114.68 270 bottom
U$236  [ESLOV_TO_QWIIC_BRIDGE0]  88.39,111.25 180 bottom
U$237  [#INT#0]  111.76,111.51 0 top
U$238  [SFE_LOGO_FLAME_STOP_.1]  115.95,112.01 0 top
U$239  [ESLOV0]  101.22,114.68 270 bottom
U$240  [ESLOV_TO_QWIIC_BRIDGE0]  111.76,111.25 180 bottom